# Altium PCB 精简版双路驱动.PcbDoc
Units mil, origin at the board's own origin, x right, y up, seen from the top; angles counter-clockwise.
Board outline 2215.03 x 2655.03 mil, 2 copper layers (Top, Bottom); 44 components, 37 nets, 199 pads, 164 vias.
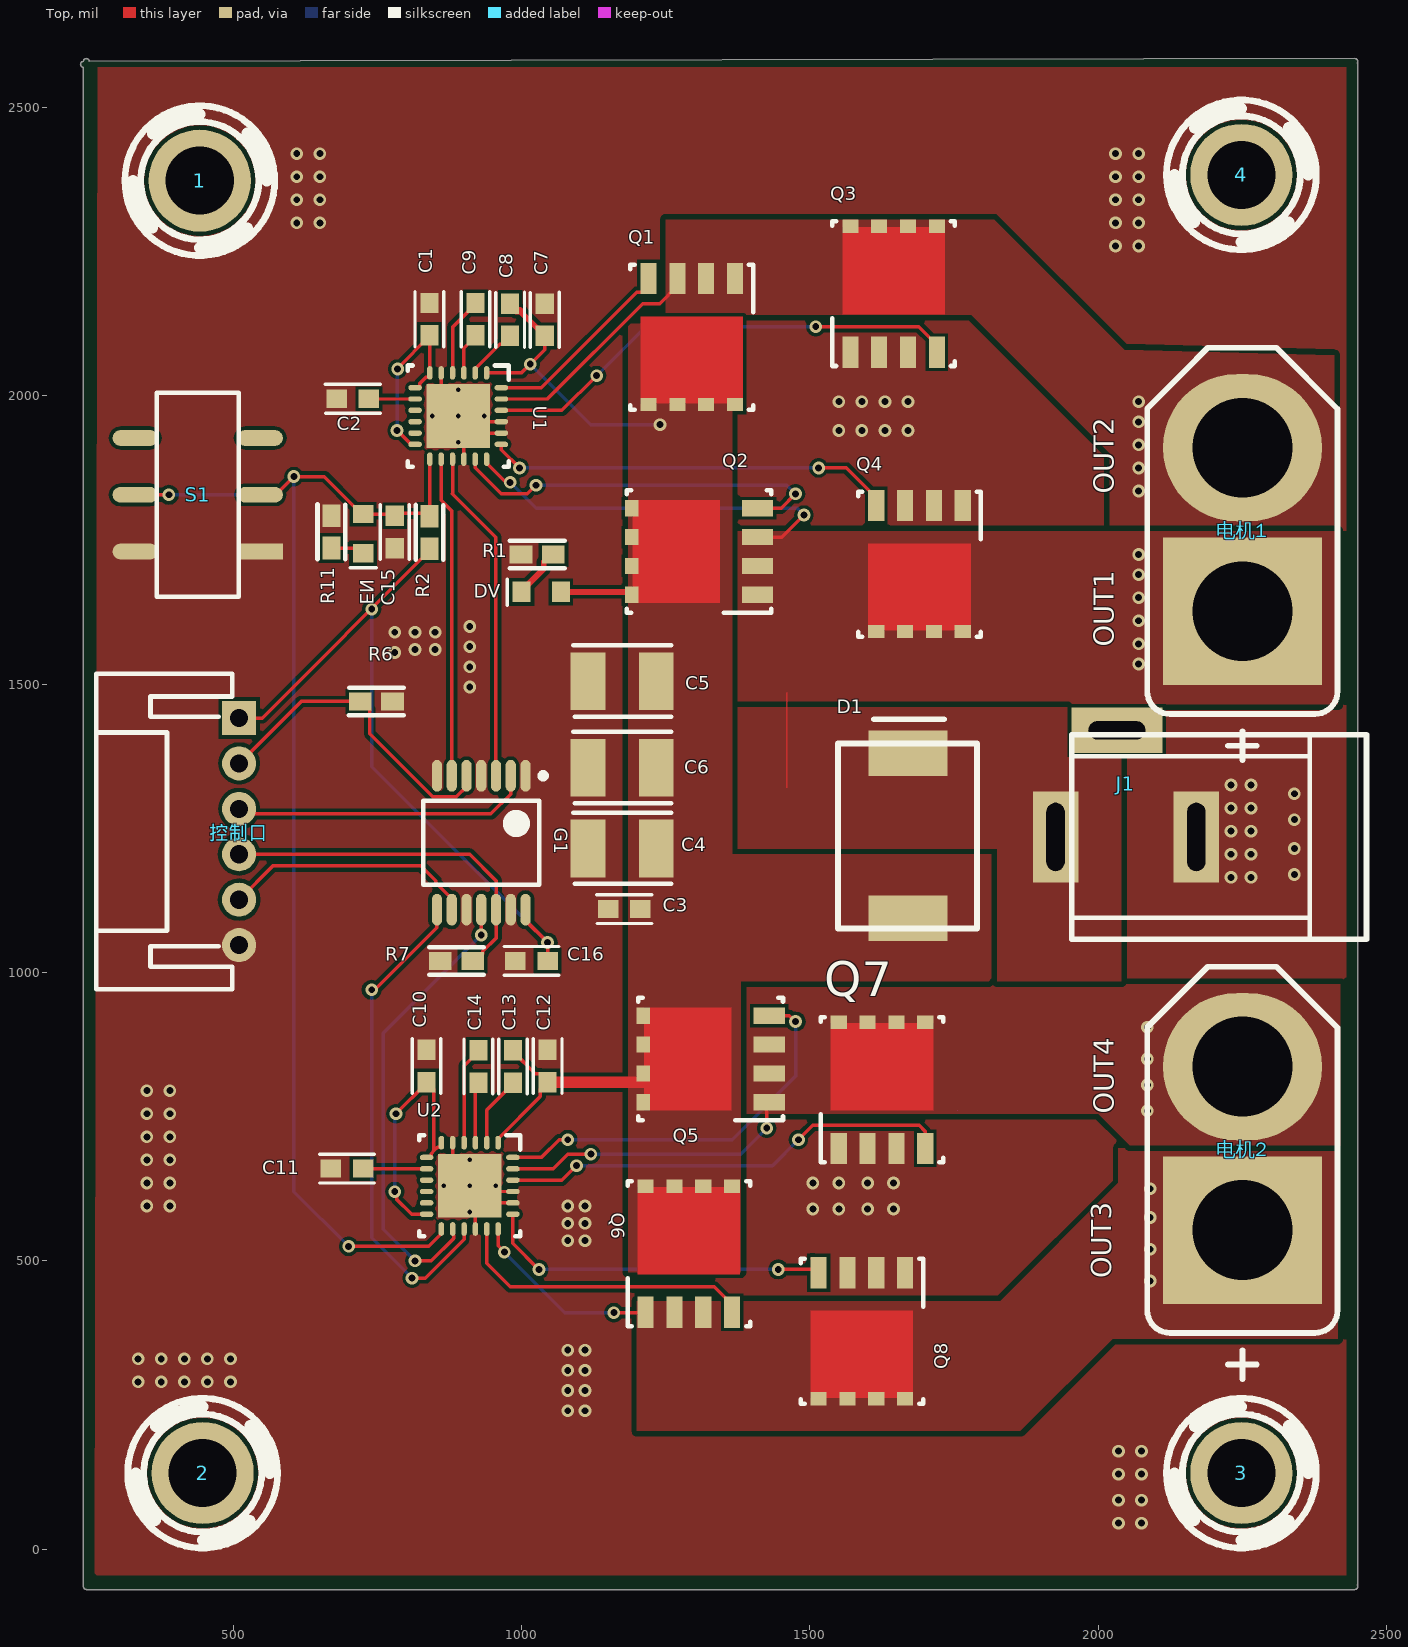
[diagram p0: Top view]
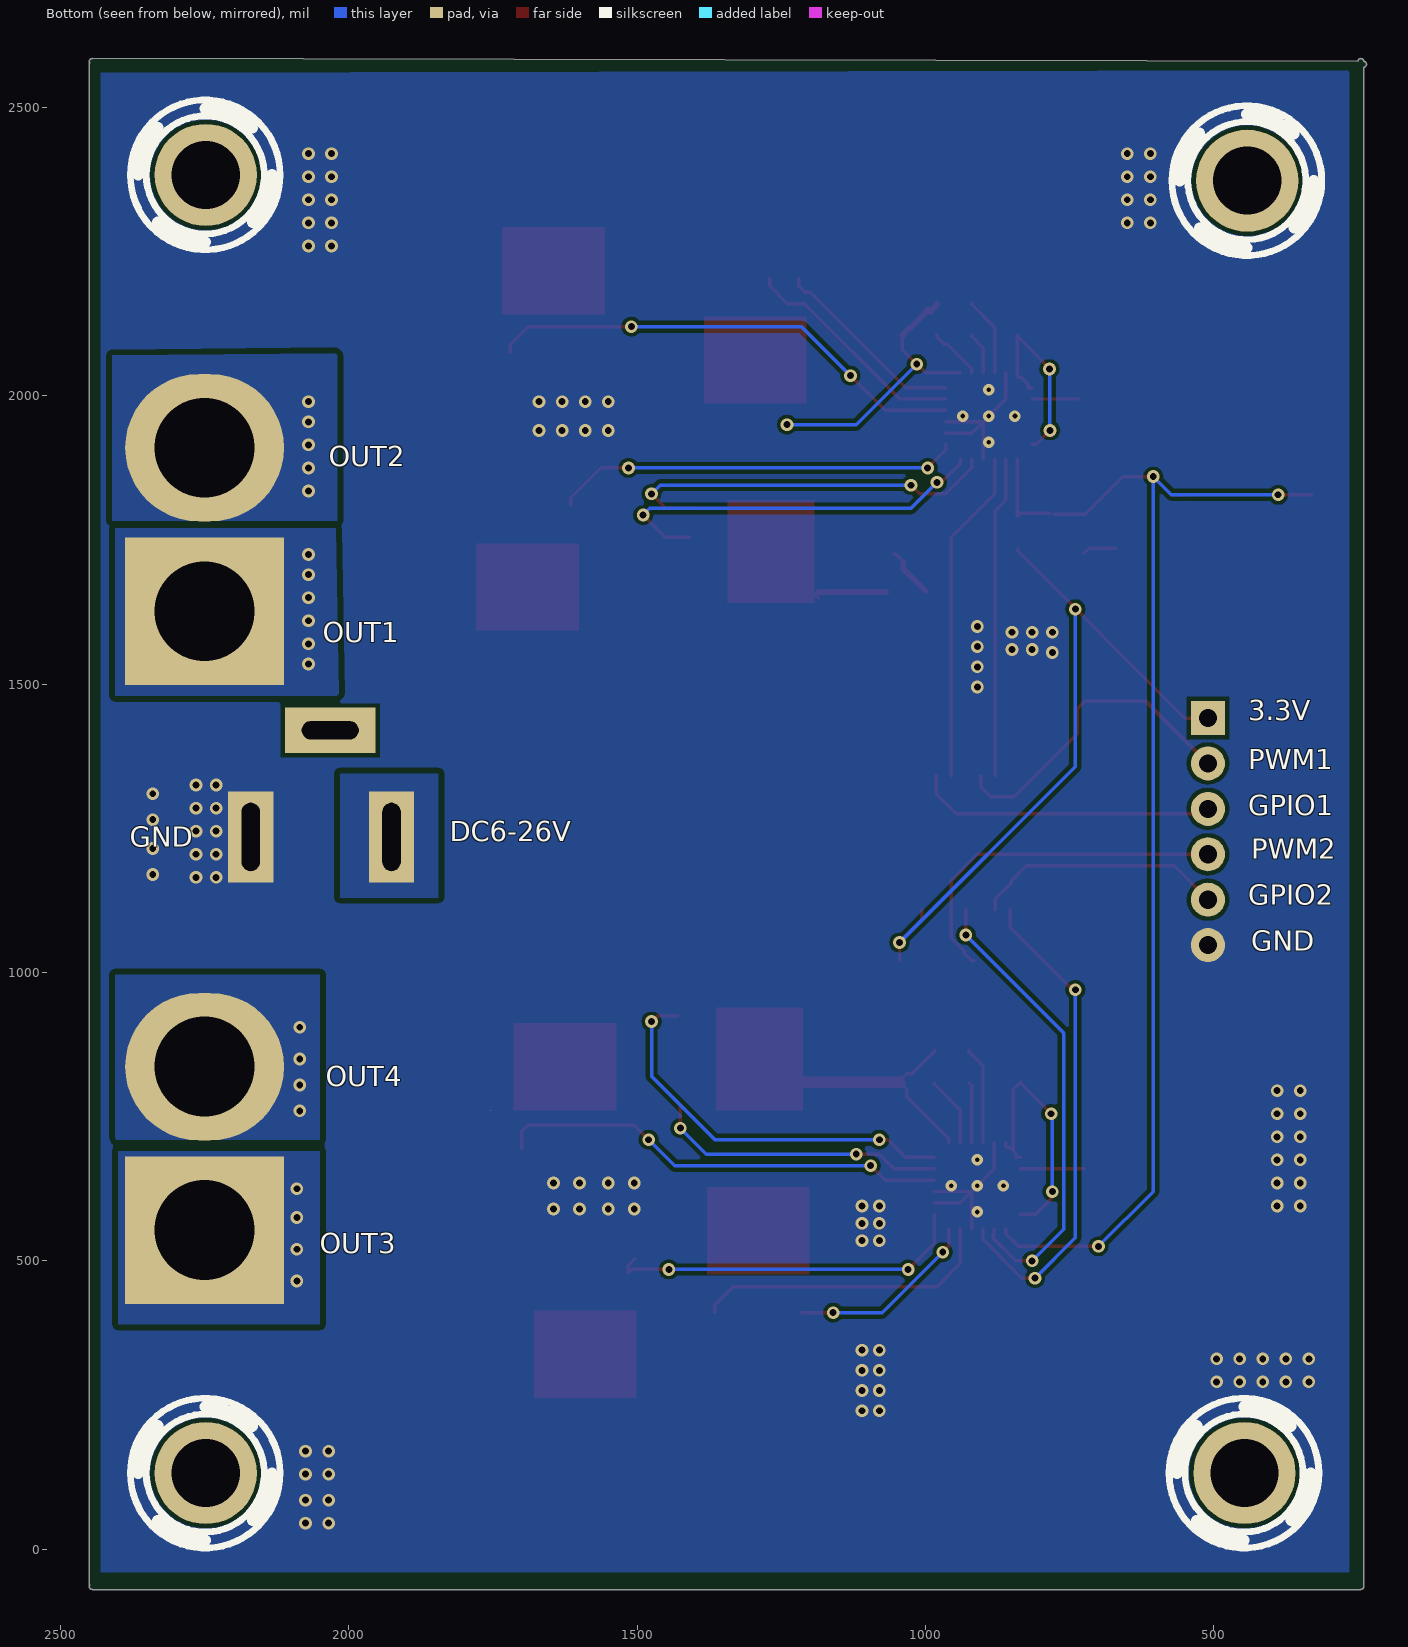
[diagram p1: Bottom view, seen from below]
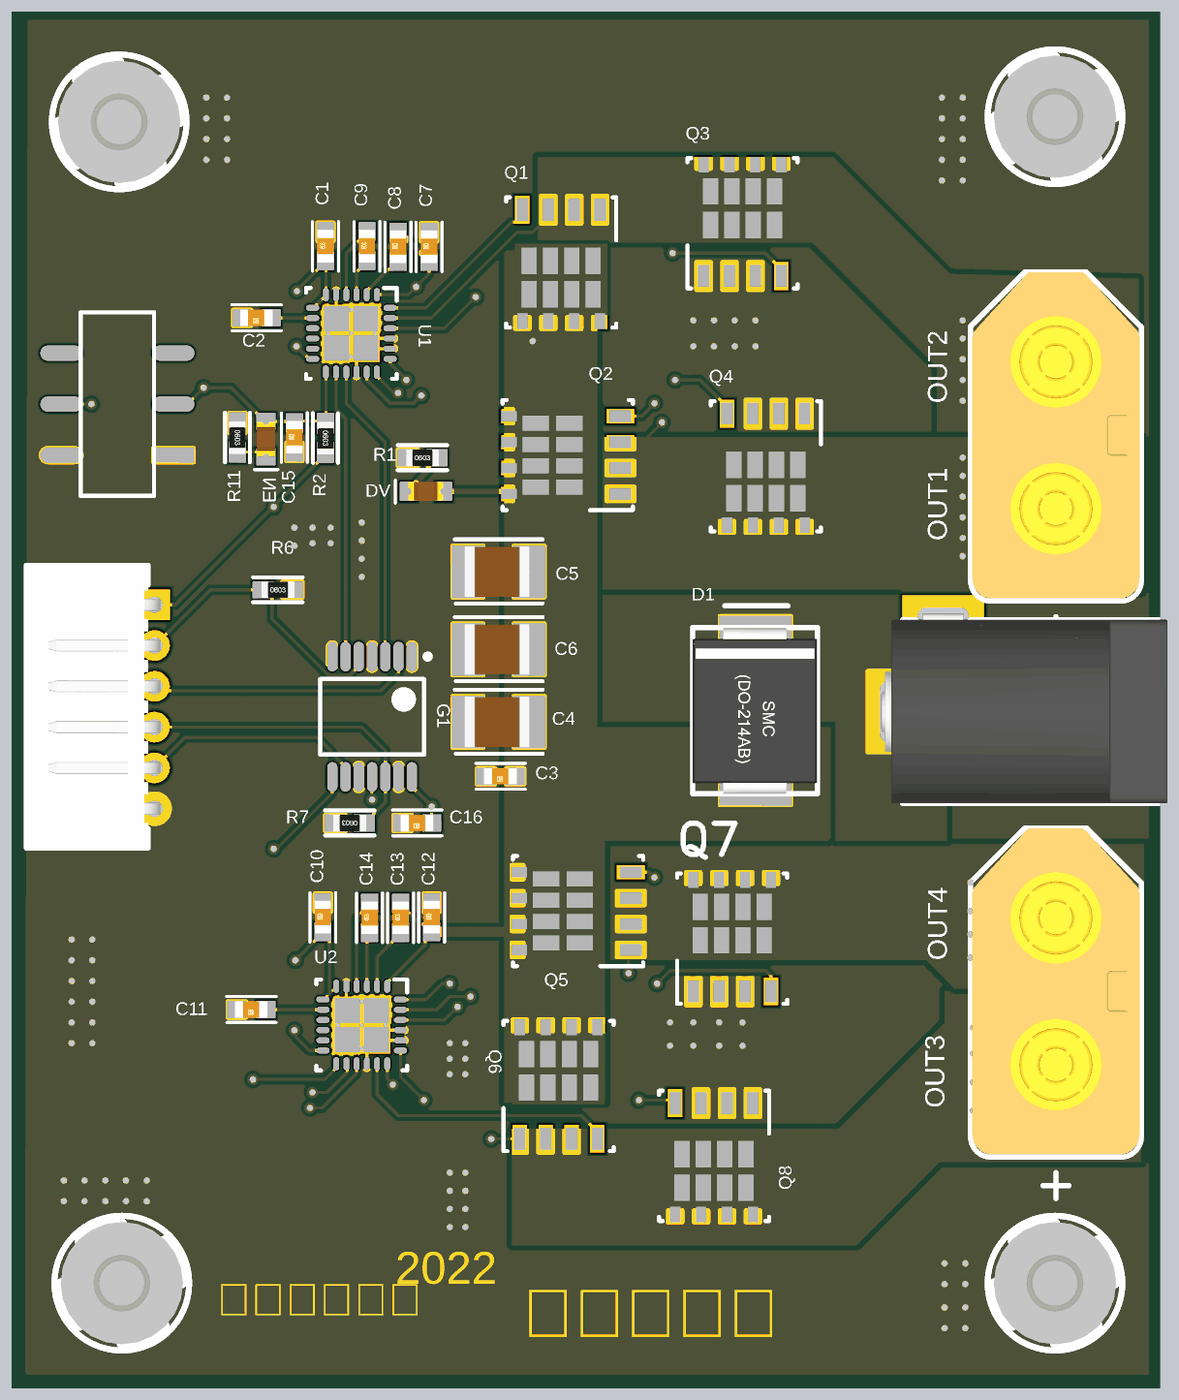
[diagram p2: 3D render of the assembled board from above, using the file's embedded part models]

## Layer stack, top to bottom
Top Solder: solder mask 0.4, Solder Resist, Dk 3.5
Top: signal copper 1.4
Dielectric 1: dielectric 12.6, FR-4, Dk 4.8
Bottom: signal copper 1.4
Bottom Solder: solder mask 0.4, Solder Resist, Dk 3.5

## Board outline
239.99,-65 239.99,-64.96 239.99,2569.98 cw(c240,2575) 239.99,2580.01 cw(c245,2580) 250.01,2580.04 2444.99,2585.01 cw(c2445,2580) 2450.01,2580 cw(c2445,2580) 2449.35,2577.5 cw(c2445,2575) 2450.01,2575 2450.01,-60 cw(c2445,-60) 2449.35,-62.5 cw(c2445,-65) 2450.01,-65 cw(c2445,-65) 2445,-70.01 245,-70.02 cw(c245,-65)
cut-out: 1755,760

## Design rules (kind name [scope] priority, off if disabled: settings)
Clearance [All] p1: gap=6 ignorepadtopadclearanceinfootprint=FALSE except(7: Track-Poly THPad-Poly; 10: Poly-Poly)
PasteMaskExpansion [All] p1: expansion=1
PlaneClearance [All] p1: clearance=8
PlaneConnect [All] p1: planeconnectstyle=Direct reliefexpansion=20 reliefentries=4 reliefconductorwidth=10 reliefairgap=10
PolygonConnect [All] p1: connectstyle=Direct reliefconductorwidth=10 reliefentries=4 polygonreliefangle="90 Angle" airgapwidth=10
RoomDefinition 精简版双路驱动 [InComponentClass('精简版双路驱动')] p1: confinementstyle=ConfineIn formatcopy=TRUE lockcomponents=FALSE outline -370,-1900 -370,-845
RoutingVias [All] p1: holewidth=12 width=22 viastyle="Through Hole" minholewidth=12 minwidth=22 maxholewidth=12 maxwidth=22
SolderMaskExpansion [All] p1: expansion=4 istentingtop=FALSE
Width [All] p1: maxlimit=6 minlimit=6 preferedwidth=6
27 further rules are at their usual default settings.

## Components (designator, comment, footprint, x,y, rotation, side; value= is the part's Value field where it differs from the comment)
1 "螺丝孔" LQ_SCROW3&5MM 441.85,2373.15 r90 top
2 "螺丝孔" LQ_SCROW3&5MM 446.85,131.85 r90 top
3 "螺丝孔" LQ_SCROW3&5MM 2248.15,131.85 r90 top
4 "螺丝孔" LQ_SCROW3&5MM 2248.15,2383.15 r90 top
C1 "105" LQ_C0603 840,2105 r90 top value=1uF
C2 "105" LQ_C0603 735,1995 r180 top value=1uF
C3 "104" LQ_C0603 1206,1110 r180 top value=1uF
C4 "107" LQ_C1210 1233.11,1215 r180 top value=1uF
C5 "107" LQ_C1210 1233.11,1505 r180 top value=1uF
C6 "107" LQ_C1210 1233.11,1355 r180 top value=470uF
C7 "104" LQ_C0603 1040,2104 r90 top value=1uF
C8 "105" LQ_C0603 980,2104 r90 top value=1uF
C9 "104" LQ_C0603 920,2105 r90 top value=1uF
C10 "105" LQ_C0603 835,810 r90 top value=1uF
C11 "105" LQ_C0603 725,660 r180 top value=1uF
C12 "104" LQ_C0603 1045,810 r90 top value=1uF
C13 "105" LQ_C0603 985,809 r90 top value=1uF
C14 "104" LQ_C0603 925,809 r90 top value=1uF
C15 "104" LQ_C0603 780,1736 r90 top value=1uF
C16 "104" LQ_C0603 1045,1020 r180 top value=1uF
D1 "SK1010C" LQ_DSMC-DO-214AB 1670,1389.06 r270 top
DV "红色" LQ_LED0603R 1068,1660 r180 top value=Green
EN "翠绿" LQ_LED0603R 725,1795 r270 top value=Green
G1 "74HC125W" TSOP65P640X110-14N 930,1225 r270 top
J1 "DC接口" DC-005 2170,1235 r0 top
Q1 "TPH1R403NL/CSD18532Q5B" LQ_SON5X6 1295,2094.3 r270 top value=60V
Q2 "TPH1R403NL/CSD18532Q5B" LQ_SON5X6 1300,1730 r180 top value=60V
Q3 "TPH1R403NL/CSD18532Q5B" LQ_SON5X6 1645,2185 r90 top value=60V
Q4 "TPH1R403NL/CSD18532Q5B" LQ_SON5X6 1690,1700.7 r270 top value=60V
Q5 "TPH1R403NL/CSD18532Q5B" LQ_SON5X6 1320,850 r180 top value=60V
Q6 "TPH1R403NL/CSD18532Q5B" LQ_SON5X6 1290,520 r90 top value=60V
Q7 "TPH1R403NL/CSD18532Q5B" LQ_SON5X6 1625,804.3 r90 top value=60V
Q8 "TPH1R403NL/CSD18532Q5B" LQ_SON5X6 1590,370 r270 top value=60V
R1 "10K" LQ_R0603 999,1725 r0 top
R2 "1K" LQ_R0603 840,1791 r270 top
R6 "10K" LQ_R0603 720,1470 r0 top
R7 "10K" LQ_R0603 915,1020 r180 top
R11 "10K" LQ_R0603 670,1792 r270 top
S1 "MSS22D18" LQ_SW_MSS22D18 438.27,1828.43 r180 top
U1 "DRV8701PRGER/DRV8701PRGER" RGE0024F 890,1965 r270 top
U2 "DRV8701PRGER/DRV8701PRGER" RGE0024F 910,630 r270 top
控制口 "PH2-6P" LQ_PH2.0-WI-6P 510,1244.37 r270 top
电机1 "KF301-2P" TX60-LI-S 2250,1768.27 r90 top
电机2 "KF301-2P" TX60-LI-S 2250,695 r90 top

## Footprints (in the part's own frame and the unit in brackets; to place one, negate y for a bottom-side part, rotate by r counter-clockwise, add the part's x,y. Pads: shape width x height; smd on the part's side, far side on the other; paste and mask are expansions set on the pad)
DC-005 [mm] "5.5*2.1mm，DC30V,2.5A"
  rect 2x4 hole 0.8 slot 3 at 90 deg: 1(-6.2,0) 2(0,0)
  rect 4x2 hole 0.8 slot 2.5 at 0 deg: 3(-3.5,4.7)
  silkscreen extent -5.48,-4.5 7.5,4.5, body extent -6.55,-4.5 7.5,4.8, height 11.2
LQ_C0603 [mm]
  rect 0.9x0.8 smd: 1(0,0) 2(1.422,0)
  silkscreen extent -0.5,-0.64 1.92,0.64, body extent -0.08,-0.4 1.52,0.4, height 0.3
LQ_C1210 [mil]
  rect 60x100 smd: 1(0,0) 2(118.11,0)
  silkscreen extent -26,-62 143,61, body extent -1,-49 125,49, height 98
LQ_DSMC-DO-214AB [mm]
  rect 2x3.5 smd: 1(0.23,0) 2(7.5,0)
  silkscreen extent -1.27,-3.08 7.94,3.04, body extent -0.18,-3.08 7.95,3.02, height 2.4
LQ_LED0603R [mm]
  rect 0.8x0.9 smd: 1(0,0) 2(1.727,0)
  silkscreen extent 2.36,-0.56 2.36,0.58, body extent 0.02,-0.45 1.72,0.45, height 0.9
LQ_PH2.0-WI-6P [mm] "长：13.9mm，宽：6mm，高：4.7mm"
  rect 1.5x1.5 hole 0.8: 1(-5,0)
  round 1.5 hole 0.8: 2(-3,0) 3(-1,0) 4(1,0) 5(3,0) 6(5,0)
  silkscreen extent -6.95,-6.3 6.95,-0.3, body extent -6.95,-6.3 6.95,0.3, height 4.75
LQ_R0603 [mm]
  rect 1x0.8 smd: 1(0,0) 2(1.422,0)
  silkscreen extent -0.5,-0.61 1.92,0.61, body extent -0.08,-0.4 1.52,0.4, height 0.48
LQ_SCROW3&5MM [mm]
  round 4.5 hole 3: 1(0,0)
  silkscreen extent -3.3,-3.3 3.3,3.3, body extent -3,-3 3,3, height 1.3
LQ_SON5X6 [mm] "TI recommended land pattern (nominal) November 2012"
  rect 1.372x0.71 smd paste-0.4: 1(-2.776,1.905) 2(-2.776,0.635) 3(-2.776,-0.635) 4(-2.776,-1.905)
  rect 0.59x0.71 smd paste-0.3: 5(2.776,-1.905) 6(2.776,-0.635) 7(2.776,0.635) 8(2.776,1.905)
  Top region: -1.107,-2.26 2.743,-2.26 2.743,2.26 -1.107,2.26
  silkscreen extent -3.38,-2.7 3,2.7, body extent -3.23,-2.55 2.87,2.55, height 1.06
LQ_SW_MSS22D18 [mm]
  rect 2x0.7 smd: 1(-2.75,2.5)
  oval 2x0.7 smd: 1(2.75,2.5) 2(-2.75,0) 2(2.75,0) 3(-2.75,-2.5) 3(2.75,-2.5)
  silkscreen extent -1.8,-4.5 1.8,4.5
RGE0024F [mm] "QFN, 24-Leads, Body 4x4mm, Pitch 0.5mm, Thermal Pad 2.8x2.8mm, TI Recommended"
  oval 0.6x0.24 smd: 1(-1.9,1.25) 2(-1.9,0.75) 3(-1.9,0.25) 4(-1.9,-0.25) 5(-1.9,-0.75) 6(-1.9,-1.25) 13(1.9,-1.25) 14(1.9,-0.75) 15(1.9,-0.25) 16(1.9,0.25) 17(1.9,0.75) 18(1.9,1.25)
  oval 0.24x0.6 smd: 7(-1.25,-1.9) 8(-0.75,-1.9) 9(-0.25,-1.9) 10(0.25,-1.9) 11(0.75,-1.9) 12(1.25,-1.9) 19(1.25,1.9) 20(0.75,1.9) 21(0.25,1.9) 22(-0.25,1.9) 23(-0.75,1.9) 24(-1.25,1.9)
  rect 2.8x2.8 smd paste-1.4: 25(0,0)
  silkscreen extent -2.22,-2.22 2.22,2.22, body extent -2.07,-2.07 2.08,2.08, height 1.01
TSOP65P640X110-14N [mm] "TSOP, 14-Leads, Body 5.00x4.40mm, Pitch 0.65mm, IPC Medium Density"
  oval 1.4x0.45 smd: 1(-2.95,1.95) 2(-2.95,1.3) 3(-2.95,0.65) 4(-2.95,0) 5(-2.95,-0.65) 6(-2.95,-1.3) 7(-2.95,-1.95) 8(2.95,-1.95) 9(2.95,-1.3) 10(2.95,-0.65) 11(2.95,0) 12(2.95,0.65) 13(2.95,1.3) 14(2.95,1.95)
  silkscreen extent -3.07,-2.55 1.85,2.85, body extent -2.25,-2.55 2.25,2.55, height 1.1
TX60-LI-S [mm] "长：16mm，宽：8.2mm，高：16mm"
  rect 6.5x7 hole 4.4: 1(-3.6,0)
  oval 6.5x7 hole 4.4: 2(3.6,0)
  silkscreen extent -10.16,-4.19 8,4.19, body extent -8,-4.1 8,4.1, height 16.05

## Part data
C1 C2 C8 C10 C11 C13: library part GRM188R70J105KA01D, Cap_Case=0603, Manufacturer=MuRata, Supplier Part Number 1=490-3898-1-ND, TempCo=X7R, Tolerance_%=10, Value1=Unknown, Value2=6.3V, ValueDisplayed=1µF, Cap_F=0.000001, ComponentLink1Description="Datasheet link", ComponentLink1URL=http://search.murata.co.jp/Ceramy/PnsearchViewAction.do?HnOFG=ON&HnNFG=ON&SEL_CNT=50&sLang=en&sKey=GRM188R70J105KA01D&x=9&y=9&search=startwith, CompType=Capacitor, LatestRevisionDate=2014-05-28, MountType=SMT, PackageReference=0603, PartNumber=GRM188R70J105KA01D, Polarized=N, Published=2008-06-19, Publisher="Texas Instruments", RoHS=Y, Supplier 1=Digi-Key, Supplier 2=Mouser, Supplier 3=Farnell, Supplier Part Number 2=81-GRM188R70J105KA01, Supplier Part Number 3=1845765, SymbolVersion=2008-07-09, TaMax_C=125, TaMin_C=-55, Technology=Ceramic, U/M=EA, VDC_V=6.3
C3 C4 C5 C7 C9 C12 C14 C15 C16: library part GRM21BR71H105KA12L, Cap_Case=0805, Manufacturer=MuRata, Supplier Part Number 1=490-4736-1-ND, TempCo=X7R, Tolerance_%=10, Value1=Unknown, Value2=50V, ValueDisplayed=1µF, Cap_F=0.000001, ComponentLink1Description="Datasheet link", ComponentLink1URL=http://search.murata.co.jp/Ceramy/PnsearchViewAction.do?HnOFG=ON&HnNFG=ON&SEL_CNT=50&sLang=en&sKey=GRM21BR71H105KA12L&x=9&y=9&search=startwith, CompType=Capacitor, LatestRevisionDate=2013-09-06, MountType=SMT, PackageReference=0805, PartNumber=GRM21BR71H105KA12L, Polarized=N, Published=2008-06-19, Publisher="Texas Instruments", RoHS=Y, Supplier 1=Digi-Key, Supplier 2=Mouser, Supplier 3=Farnell, Supplier Part Number 2=81-GRM21BR71H105KA2L, Supplier Part Number 3=1735541, SymbolVersion=2008-07-09, TaMax_C=125, TaMin_C=-55, Technology=Ceramic, U/M=EA, VDC_V=50
C6: library part ECA-1HM471, Cap_Case=10x20mm, Manufacturer=Panasonic, Supplier Part Number 1=P5185-ND, Tolerance_%=20, Value1=Unknown, Value2=50V, ValueDisplayed=330µF/35V, Cap_F=0.00047, ComponentLink1Description="Datasheet link", ComponentLink1URL=http://industrial.panasonic.com/www-data/pdf/ABA0000/ABA0000CE12.pdf, CompType=Capacitor, IRMS_A=0.65, LatestRevisionDate=2015-02-10, MountType=TH, PackageReference=D10xL20mm, PartNumber=ECA-1HM471, Polarized=Y, Publisher="Texas Instruments", RoHS=Y, Series=M, Supplier 1=Digi-Key, Supplier 2=Mouser, Supplier 3=Farnell, Supplier Part Number 2=667-ECA-1HM471, Supplier Part Number 3=9693815, SymbolVersion=2008-07-09, TaMax_C=85, TaMin_C=-40, Technology=AL, U/M=EA, VDC_V=50
DV EN: library part LTST-C171GKT, Color=green, Manufacturer=Lite-On, Supplier Part Number 1=160-1423-1-ND, Value1=W, Value2=2.1V, ComponentLink1Description="Datasheet link", ComponentLink1URL=https://sps06.itg.ti.com/sites/KMS/crossdivteams/altium/docs/ComponentDatasheets/LTST-C171GKT.pdf, CompType=LED, Io_A=20, LatestRevisionDate=2013-09-07, MountType=SMT, PackageReference=LED_0805, PartNumber=LTST-C171GKT, Published=2008-07-11, Publisher="Texas Instruments", RoHS=Y, Supplier 1=Digi-Key, Supplier 2=Mouser, Supplier Part Number 2=859-LTST-C171GKT, SymbolVersion=2008-12-08, Type=AlInGaP, U/M=EA, Vf_V=2.1
Q1 Q2 Q3 Q4 Q5 Q6 Q7 Q8: library part CSD18532Q5B, Alternate Manufacturer=None, Manufacturer="Texas Instruments", Supplier Part Number 1=296-35628-1-ND, Value1="3.3 ohm", Value2="27 nC", ChType=N, ComponentLink1Description="Datasheet link", ComponentLink1URL=http://www.ti.com/lit/gpn/csd18532q5b, CompType=MOSFET, IdsMax_A=172, LatestRevisionDate=2014-05-23, LatestRevisionNote="Added parts.", MountType=SMT, PackageReference="SON 5x6mm", PartNumber=CSD18532Q5B, Published=2008-06-19, Publisher="Texas Instruments", QgTyp_nC=27, Rdson45_Ohm=3.3, RoHS=Y, Supplier 1=Digi-Key, Supplier 2=Mouser, Supplier 3=Newark, Supplier Part Number 2=595-CSD18532Q5B, Supplier Part Number 3=63W5308, SymbolVersion=2008-07-09, U/M=EA, VdsMax_V=60, Vgs_V=1.6
R1 R6 R7 R11: library part CRCW06034K99FKEA, Manufacturer=Vishay-Dale, Power_W=0.1, Supplier Part Number 1=541-4.99KHCT-ND, TempCo="100 ppm/C", Tolerance_%=1, Value1=1%, Value2=0.1W, Value_Code=4k99, ComponentLink1Description="Datasheet link", ComponentLink1URL=http://www.vishay.com/docs/20035/dcrcwe3.pdf, CompType=Resistor, EIA_Code=E96, LatestRevisionDate=2013-10-22, MountType=SMT, PackageReference=0603, PartNumber=CRCW06034K99FKEA, Published=2008-06-26, Publisher="Texas Instruments", Res_ohm=4990, RoHS=Y, Supplier 1=Digi-Key, Supplier 2=Mouser, Supplier 3=Farnell, Supplier Part Number 2=71-CRCW0603-4.99K-E3, Supplier Part Number 3=1652885, SymbolVersion=2009-05-29, Technology="Thick Film", U/M=EA, VDC_V=75
R2: library part RES
S1: library part "SW SPST"
U1 U2: library part DRV8701ERGER, Alternate Manufacturer="Texas Instruments", Alternate PartNumber=DRV8701ERGET, ComponentLink1Description="Datasheet Link", ComponentLink1URL=https://sps06.itg.ti.com/sites/KMS/crossdivteams/altium/docs/ComponentDatasheets/DRV8701_011615.pdf, CompType=IC, LatestRevisionDate=2015-02-10, Manufacturer="Texas Instruments", MountType=SMT, PackageReference=RGE0024F, PartNumber=DRV8701ERGER, Publisher="Texas Instruments", SymbolCreator=Altium, SymbolVersion=2015-02-10, U/M=EA
控制口: library part 控制口
电机1 电机2: library part "691 101 710 002", Manufacturer="Wurth Elektronik eiSos", Supplier Part Number 1=732-2026-ND, ComponentLink1Description="Datasheet Link", ComponentLink1URL=http://katalog.we-online.de/em/datasheet/6911017100xx.pdf, CompType="Terminal Block", LatestRevisionDate=2015-02-03, MountType=TH, PackageReference="Terminal Block, 5 mm, 2x1, TH", PartNumber="691 101 710 002", Publisher="Texas Instruments", RoHS=Y, Supplier 1=Digi-Key, Supplier 2=Mouser, Supplier Part Number 2=710-691101710002, SymbolCreator=a0412235, SymbolVersion=2013-09-04, U/M=EA

## Via types
v1: diameter 22, hole 12, Top to Bottom, tented both sides, 154 vias
v2: diameter 20, hole 8, Top to Bottom, 10 vias

## Nets (pads, with @x,y where several pads share a name; then routed paths per layer and width w, separated by ;. In a path a pad name is that pad's centre, name@x,y a point inside that pad or via, vN(x,y) a via of type N, cw(c..) or ccw(c..) an arc to the next point about the centre after c; other vN are vias at no path point)
3.3V: C16.1 G1.14 R2.2 控制口.1 | length 1263.1
  Top w6: 控制口.1 550.16,1441.22 840,1731.06 R2.2 ; G1.14 1006.77,1090.16 v1(1045,1051.93) C16.1
  Bottom w6: v1(740,1630) 740,1356.93 v1(1045,1051.93)
AVDD: C10.1 U2.6 U2.7 U2.12 | length 457
  Top w6: v1(780,620) 783.06,616.94 783.06,606.94 809.21,580.79 U2.12 ; v1(781.97,755) 835,808.03 C10.1 847.75,797.25 847.75,692.25 848.52,691.48 ; U2.7 841.35,679.21 842.94,680.81 842.94,685.91 848.52,691.48 ; U2.6 860.79,698.65 859.19,697.06 854.09,697.06 848.52,691.48
  Bottom w6: v1(780,620) 780,753.03 v1(781.97,755)
AVDD1: C1.1 U1.6 U1.7 U1.12 | length 337.9
  Top w6: v1(783.9,1940) 808.11,1915.79 U1.12 ; v1(785,2046.52) 785,2048.03 840,2103.03 C1.1 840.79,2104.21 U1.6 840.79,2033.65 839.19,2032.06 834.09,2032.06 822.94,2020.91 822.94,2015.81 821.35,2014.21 U1.7
  Bottom w6: v1(783.9,1940) 784.45,1940.55 784.45,2045.96 v1(785,2046.52)
DVDD: C11.1 U2.8 | length 110.4
  Top w6: C11.1 725.47,659.53 U2.8
DVDD1: C2.1 U1.8 | length 80.4
  Top w6: C2.1 735.47,1994.53 U1.8
EN/IN2: G1.6 U1.14 | length 556.7
  Top w6: U1.14 860.47,1818.69 878.82,1800.34 G1.6
EN/IN4: G1.11 U2.14 | length 802.2
  Top w6: v1(815,500) 843.29,500 882.05,538.76 882.05,544.1 881.13,545.01 881.13,554.54 U2.14 ; v1(930,1065) G1.11
  Bottom w6: v1(815,500) 760,555 760,895 v1(930,1065)
GH1: Q6.4 U2.17 | length 527.9
  Top w6: U2.17 939.53,495.47 980,455 1333.73,455 1365,423.73 Q6.4
GH2: Q5.4 U2.24 | length 693.4
  Top w6: U2.24 1034.21,679.21 1065,710 v1(1080,710) ; Q5.4 1464.09,925 1474.09,915 v1(1475,915)
  Bottom w6: v1(1080,710) 1365,710 1475,820 v1(1475,915)
GH11: Q2.4 U1.17 | length 690.8
  Top w6: U1.17 919.53,1875.1 964.62,1830 1010,1830 v1(1025,1845) ; Q2.4@1396.27,1805 Q2.4 1450,1805 v1(1475,1830)
  Bottom w6: v1(1025,1845) 1460,1845 v1(1475,1830)
GH12: Q1.4 U1.24 | length 341.3
  Top w6: U1.24 1034.21,2014.21 1199.6,2179.6 1209.02,2179.6 1220,2190.57 Q1.4
GL1: Q8.4 U2.19 | length 630.4
  Top w6: U2.19 984.8,530.2 v1(1030,485) ; v1(1445,485) 1509.3,485 Q8.4 1515,492.33 Q8.4@1504.02,503.31
  Bottom w6: v1(1030,485) v1(1445,485)
GL2: Q7.4 U2.22 | length 788.3
  Top w6: U2.22 1069.84,639.84 v1(1095,665) ; v1(1480,710) 1505.03,735 1689.3,735 1700,724.3 Q7.4
  Bottom w6: v1(1095,665) 1435,665 v1(1480,710)
GL11: Q4.4 U1.19 | length 702.1
  Top w6: U1.19 964.8,1906.45 v1(996.25,1875) ; v1(1515,1875) 1563.03,1875 1615,1823.03 Q4.4
  Bottom w6: v1(996.25,1875) v1@1510,1875
GL12: Q3.4 U1.22 | length 841.3
  Top w6: U1.22 1069.84,1974.84 v1(1130,2035) ; v1(1510,2120) 1688.73,2120 1720,2088.73 Q3.4
  Bottom w6: v1(1130,2035) 1215,2120 v1(1510,2120)
GND: C1.2 C2.2 C3.2 C4.2 C5.2 C6.2 C7.2 C10.2 C11.2 C12.2 C15.1 C16.2 G1.1 G1.4 G1.7 G1.10 G1.13 J1.2 Q3.1 Q3.2 Q3.3 Q4.1 Q4.2 Q4.3 Q7.1 Q7.2 Q7.3 Q8.1 Q8.2 Q8.3 R1.1 R6.2 R7.2 R11.1 S1.1 U1.5 U1.16 U1.20 U1.21 U1.25 U2.5 U2.16 U2.20 U2.21 U2.25 控制口.6 | length 608
  Top w6: U1.5 860.47,1994.53 v2(890,1965) U1.25@899.84,1955.16 ; U2.5 880.47,659.53 v2(910,630) U2.25@919.84,620.16 ; U1.16 U1.25@899.84,1955.16 ; U2.16 U2.25@919.84,620.16 ; U1.20 919.53,1935.47 U1.25@899.84,1955.16 ; U1.21 U1.25@899.84,1955.16 ; U2.20 939.53,600.47 U2.25@919.84,620.16 ; U2.21 U2.25@919.84,620.16
  other v1: 2035,45 2075,45 2035,85 2075,85 2035,130 2075,130 2035,170 2075,170 1080,240 1110,240 1080,275 1110,275 335,290 375,290 415,290 455,290 495,290 1080,310 1110,310 335,330 375,330 415,330 455,330 495,330 1080,345 1110,345 1080,535 1110,535 1080,565 1110,565 1505,590 1550,590 1600,590 1645,590 350,595 390,595 1080,595 1110,595 350,635 390,635 1505,635 1550,635 1600,635 1645,635 350,675 390,675 350,715 390,715 350,755 390,755 350,795 390,795 2230,1165 2265,1165 2340,1170 2230,1205 2265,1205 2340,1215 2230,1245 2265,1245 2340,1265 2230,1285 2265,1285 2340,1310 2230,1325 2265,1325 910,1495 910,1530 780,1555 815,1560 850,1560 910,1565 780,1590 815,1590 850,1590 910,1600 1550,1940 1590,1940 1630,1940 1670,1940 1550,1990 1590,1990 1630,1990 1670,1990 2030,2260 2070,2260 610,2300 650,2300 2030,2300 2070,2300 610,2340 650,2340 2030,2340 2070,2340 610,2380 650,2380 2030,2380 2070,2380 610,2420 650,2420 2030,2420 2070,2420
  other v2: 910,584.72 864.72,630 955.28,630 910,675.28 890,1919.72 844.72,1965 935.28,1965 890,2010.28
GPIO1: G1.2 控制口.3 | length 520.8
  Top w6: 控制口.3 518.74,1275 946.72,1275 981.04,1309.32 981.04,1341 G1.2
GPIO2: G1.9 控制口.5 | length 437.8
  Top w6: 控制口.5 568.74,1185 825,1185 850.79,1159.21 850.79,1155.59 878.82,1127.56 G1.9
NetC8_1: C8.1 U1.2 | length 94.3
  Top w6: U1.2 919.53,2046.89 961.92,2089.28 967.25,2089.28 980,2102.03 C8.1 C8.1@980,2105.97
NetC9_1: C9.1 U1.3 | length 73.5
  Top w6: U1.3 899.84,2082.87 920,2103.03 C9.1
NetC9_2: C9.2 U1.4 | length 137.7
  Top w6: U1.4 880.16,2119.19 920,2159.03 C9.2
NetC14_1: C14.1 U2.3 | length 106.3
  Top w6: U2.3 919.84,803.84 C14.1
NetC14_2: C14.2 U2.4 | length 170.5
  Top w6: U2.4 900.16,838.19 925,863.03 C14.2
NetD1_1: D1.1 J1.1
NetDV_2: DV.2 R1.2 | length 90.1
  Top w6: DV.2 DV.2@1000,1661.97 ; R1.2@1038.32,1712.25 1051.06,1725 R1.2
  Top w10: DV.2@1000,1661.97 1038.32,1700.28 R1.2@1038.32,1712.25
NetEN_2: EN.2 R11.2 | length 58.7
  Top w6: R11.2 716,1736 EN.2
OUT1: Q2.1 Q2.2 Q2.3 Q4.5 Q4.6 Q4.7 Q4.8 U1.18 电机1.1 | length 690.8
  Top w6: U1.18 939.21,1883.11 972.32,1850 v1(980,1850) ; Q2.3 1451.36,1755 v1(1489.57,1793.21)
  Bottom w6: v1(980,1850) 1025,1805 1477.77,1805 v1(1489.57,1793.21)
  other v1: 2070,1535 2070,1570 2070,1610 2070,1650 2070,1690 2070,1725
OUT2: Q1.1 Q1.2 Q1.3 Q3.5 Q3.6 Q3.7 Q3.8 U1.23 电机1.2 | length 399.4
  Top w6: U1.23 1044.53,1994.53 1210,2160 1239.43,2160 1270,2190.57 Q1.3
  other v1: 2070,1835 2070,1875 2070,1915 2070,1955 2070,1990
OUT3: Q6.1 Q6.2 Q6.3 Q8.5 Q8.6 Q8.7 Q8.8 U2.18 电机2.1 | length 333.4
  Top w6: U2.18 959.21,525.79 v1(970,515) ; v1(1160,410) 1214.3,410 Q6.1
  Bottom w6: v1(970,515) 1075,410 v1(1160,410)
  other v1: 2090,465 2090,520 2090,575 2090,625
OUT4: Q5.1 Q5.2 Q5.3 Q7.5 Q7.6 Q7.7 Q7.8 U2.23 电机2.2 | length 516.2
  Top w6: U2.23 1054.53,659.53 1080,685 v1(1120,685) ; v1(1425,730) 1425,770.7 Q5.1
  Bottom w6: v1(1120,685) 1380,685 v1(1425,730)
  other v1: 2085,760 2085,805 2085,850 2085,905
PH/IN1: G1.3 U1.15 | length 580.4
  Top w6: U1.15 880.16,1830.16 880,1830 955,1755 955,1341.73 G1.3
PH/IN3: G1.8 U2.15 | length 853.7
  Top w6: v1(740,970) 745,970 852.57,1077.57 852.57,1108.2 G1.8 ; v1(810,470) 832.97,470 900.16,537.19 U2.15
  Bottom w6: v1(740,970) 740,540 v1(810,470)
PWM1: G1.5 R6.1 控制口.2 | length 559.1
  Top w6: 控制口.2 617.52,1470 R6.1 723.94,1470 736.68,1457.25 736.68,1413.73 845.83,1304.58 886.55,1304.58 904.41,1322.44 G1.5
PWM2: G1.12 R7.1 控制口.4 | length 622.6
  Top w6: 控制口.4 910,1205 955.59,1159.41 G1.12 955.59,1059.59 932.68,1036.68 932.68,1032.75 919.94,1020 R7.1@916,1020
SLEEP: C15.2 EN.1 R2.1 U1.13 U2.13 | length 2266.4
  Top w6: 330,1828.43 v1(388.27,1828.43) ; 546.54,1828.43 573.43,1828.43 v1(605,1860) 658.03,1860 723.03,1795 EN.1 C15.2@777,1795 ; v1(700,525) 838.61,525 860.79,547.18 U2.13 ; C15.2@784,1796 R2.1@840,1796 ; R2.1 840.79,1791.79 U1.13
  Bottom w6: v1(388.27,1828.43) 573.43,1828.43 v1(605,1860) 605,620 v1(700,525)
VCP: C13.1 U2.2 | length 123
  Top w6: U2.2 939.53,761.56 985,807.03 C13.1
VM: C3.1 C4.1 C5.1 C6.1 C7.1 C8.2 C12.1 C13.2 D1.2 DV.1 Q1.5 Q1.6 Q1.7 Q1.8 Q2.5 Q2.6 Q2.7 Q2.8 Q5.5 Q5.6 Q5.7 Q5.8 Q6.5 Q6.6 Q6.7 Q6.8 U1.1 U2.1 | length 1023.1
  Top w6: U1.1 999.8,2039.8 v1(1015,2055) 1040,2080 C7.1 ; U2.1 959.21,711.89 1032.25,784.93 1032.25,797.25 C12.1 1045,811.97 1032.25,824.72 1023.31,824.72 985,863.03 C13.2 ; Q2.8@1185.7,1650 Q2.8 Q2.8@1185.7,1660
  Top w10: C8.2 980,2158.03 C8.2@990.75,2147.28 ; 996.78,2147.28 1027.34,2116.72 1029.25,2116.72 1040,2105.97 C7.1 ; DV.1 Q2.8@1185.7,1660
  Top w13: C8.2@990.75,2147.28 996.78,2147.28
  Top w20: C12.1 1215,810
  Bottom w6: v1(1015,2055) 1120,1950 v1(1240,1950)
pads on no net: 1.1 2.1 3.1 4.1 J1.3 S1.2 S1.3 U1.9 U1.10 U1.11 U2.9 U2.10 U2.11

## Polygon pours and split planes (outlines as drawn)
GND on Bottom "GND_L02_P113" (solid, pour order 113): 265,2565 265,-40 2430,-40 2430,2559.99
NetD1_1 on Bottom "NETD1_1_L02_P101" (solid, pour order 101): 2015,1344.85 2015,1130 1845,1130 1845,1344.85
OUT3 on Bottom "OUT3_L02_P098" (solid, pour order 98): 2095,690 2400,690 2400,390 2050,390 2050,690
OUT4 on Bottom "OUT4_L02_P097" (solid, pour order 97): 2050,996.23 2050,710 2410,710 2405,715 2405,996.23
OUT1 on Bottom "OUT1_L02_P096" (solid, pour order 96): 2022.5,1770 2405,1770 2405,1480 2017.5,1480
OUT2 on Bottom "OUT2_L02_P095" (solid, pour order 95): 2020,2073.73 2020,1783.64 2410,1783.64 2410,2070
no net on Bottom "NONET_L02_P079" (solid, pour order 79): 2190,585
no net on Bottom "NONET_L02_P010" (solid, pour order 10): -535,2430
no net on Bottom "NONET_L02_P001" (solid, pour order 1): -470,1725
GND on Top "GND_L01_P114" (solid, pour order 114): 265.06,2569.98 2430,2569.99 2430,-45 259.99,-45
OUT2 on Top "OUT2_L01_P111" (solid, pour order 111): 2409.59,2070.41 2409.59,1775 2019.59,1775 2019.59,1900.4 1779.59,2140.41 1249.59,2140.41 1249.59,2305.41 1274.59,2305.41 1819.59,2305.41 2045,2080
OUT3 on Top "OUT3_L01_P110" (solid, pour order 110): 1200,430 1200,205 1865,205 2025,365 2415,365 2415,695 2395,695 2035,695 2035,635 1830,430
OUT4 on Top "OUT4_L01_P109" (solid, pour order 109): 2420,980 2395,980 1385,980 1385,755 2000,755 2055,700 2420,700
OUT1 on Top "OUT1_L01_P107" (solid, pour order 107): 1375,1765 2415,1765 2415,1465 1375,1465
VM on Top "VM_L01_P106" (solid, pour order 106): 1815,1205 1815,985 1380,985 1380,480 1185,480 1185,2125 1365,2125 1365,2100 1365,1205
NetD1_1 on Top "NETD1_1_L01_P105" (solid, pour order 105): 1825,1215 1375,1215 1375,1460 2040,1460 2040,985 1825,985
no net on Top "NONET_L01_P089" (solid, pour order 89): 2095,985
no net on Top "NONET_L01_P084" (solid, pour order 84): 1375,1165
no net on Top "NONET_L01_P074" (solid, pour order 74): 1725,495
no net on Top "NONET_L01_P069" (solid, pour order 69): 1670,2000
no net on Top "NONET_L01_P068" (solid, pour order 68): 1880,1805
VM on Top "VM_L01_P047" (solid, pour order 47): 2270,785
OUT3 on Top "OUT3_L01_P043" (solid, pour order 43): 2090,90
OUT2 on Top "OUT2_L01_P038" (solid, pour order 38): 1570,2240
OUT2 on Top "OUT2_L01_P036" (solid, pour order 36): 2260,1840
GND on Top "GND_L01_P033" (solid, pour order 33): 2145,1265
VM on Top "VM_L01_P029" (solid, pour order 29): 660,675
VM on Top "VM_L01_P026" (solid, pour order 26): 1100,1255
GND on Top "GND_L01_P020" (solid, pour order 20): 1440,1480
GND on Top "GND_L01_P019" (solid, pour order 19): 1460,1485 1460,1320
no net on Top "NONET_L01_P006" (solid, pour order 6): 1265,1295
no net on Top "NONET_L01_P005" (solid, pour order 5): 1275,1295
no net on Top "NONET_L01_P004" (solid, pour order 4): 1420,1315
no net on Top "NONET_L01_P003" (solid, pour order 3): 1695,1305
no net on Top Overlay "Top Overlay-No Net" (solid): 845,480
no net on Top Overlay "Top Overlay-No Net" (solid): 845,480
no net on Top Overlay "Top Overlay-No Net" (solid): 845,480

## Silkscreen, mask and mechanical layers (free items; w line width, h text height)
Top Overlay:
  text "OUT2" at 2039.37,1830 h60 r90
  text "OUT1" at 2039.37,1565 h60 r90
  text "OUT4" at 2039.37,755 h60 r90
  text "OUT3" at 2034.33,470 h60 r90
Bottom Overlay:
  text "OUT2" at 2035,1865.63 h60
  text "OUT1" at 2045,1560.63 h60
  text "3.3V" at 440,1425.67 h60
  text "PWM1" at 440,1340 h60
  text "GPIO1" at 440,1260.63 h60
  text "DC6-26V" at 1825,1215.63 h60
  text "GND" at 2380,1205.63 h60
  text "PWM2" at 435,1185 h60
  text "GPIO2" at 440,1105.63 h60
  text "GND" at 435,1025.63 h60
  text "OUT4" at 2040,790.63 h60
  text "OUT3" at 2050,500.67 h60
Top Solder:
  text "2022" at 974.89,131.05 h100
  text "江苏师范大学" at 630,31.63 h100
  text "巧夺天工队" at 1220,28.08 h150
Mechanical 1:
  lines w10: 240,2575 2445,2580 ; 245,2580 245,-65 2445,-65 ; 2445,-60 2445,2575